# Altium PCB AW_SHIELD.PcbDoc
Units mil, origin at the board's own origin, x right, y up, seen from the top; angles counter-clockwise.
Board outline 2700 x 2100 mil, 2 copper layers (Top Layer, Bottom Layer); 125 components, 67 nets, 319 pads, 105 vias.
Unrouted connection lines stored in the file: 2.
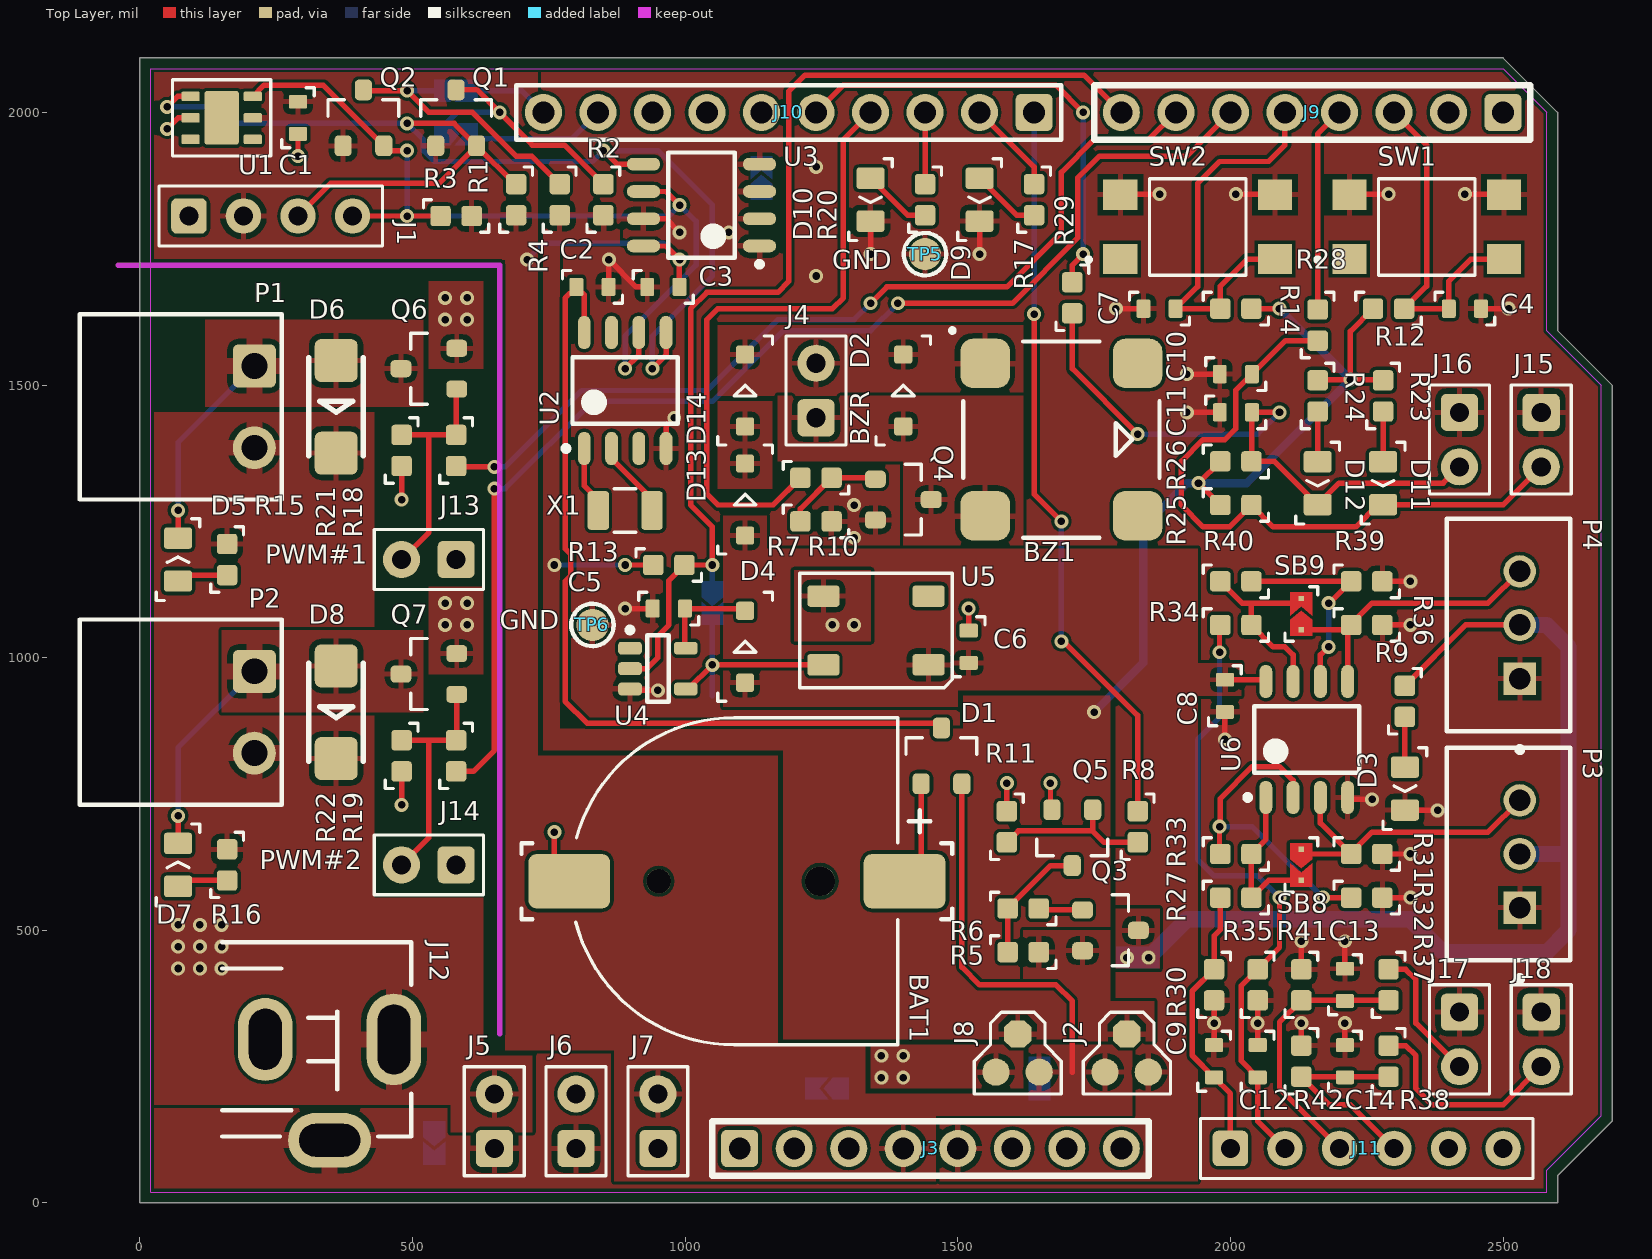
[diagram p0: Top Layer view]
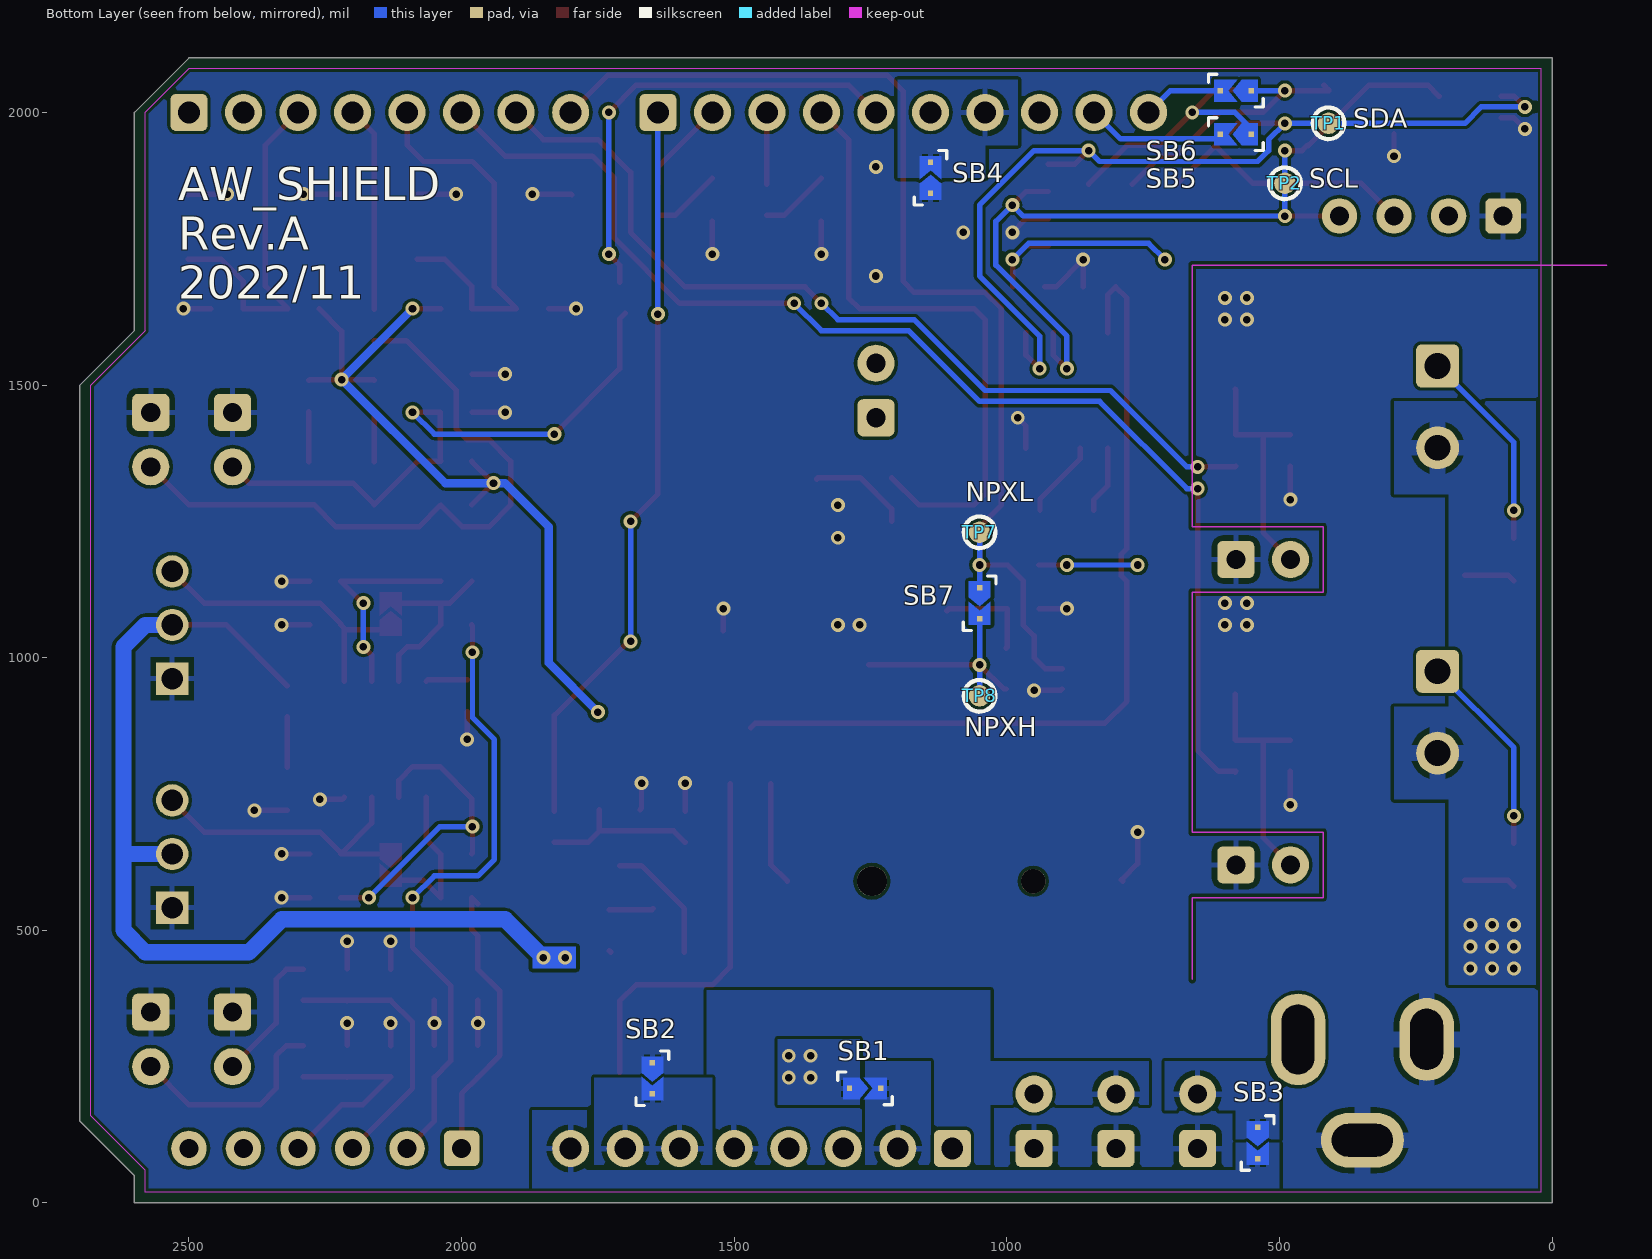
[diagram p1: Bottom Layer view, seen from below]
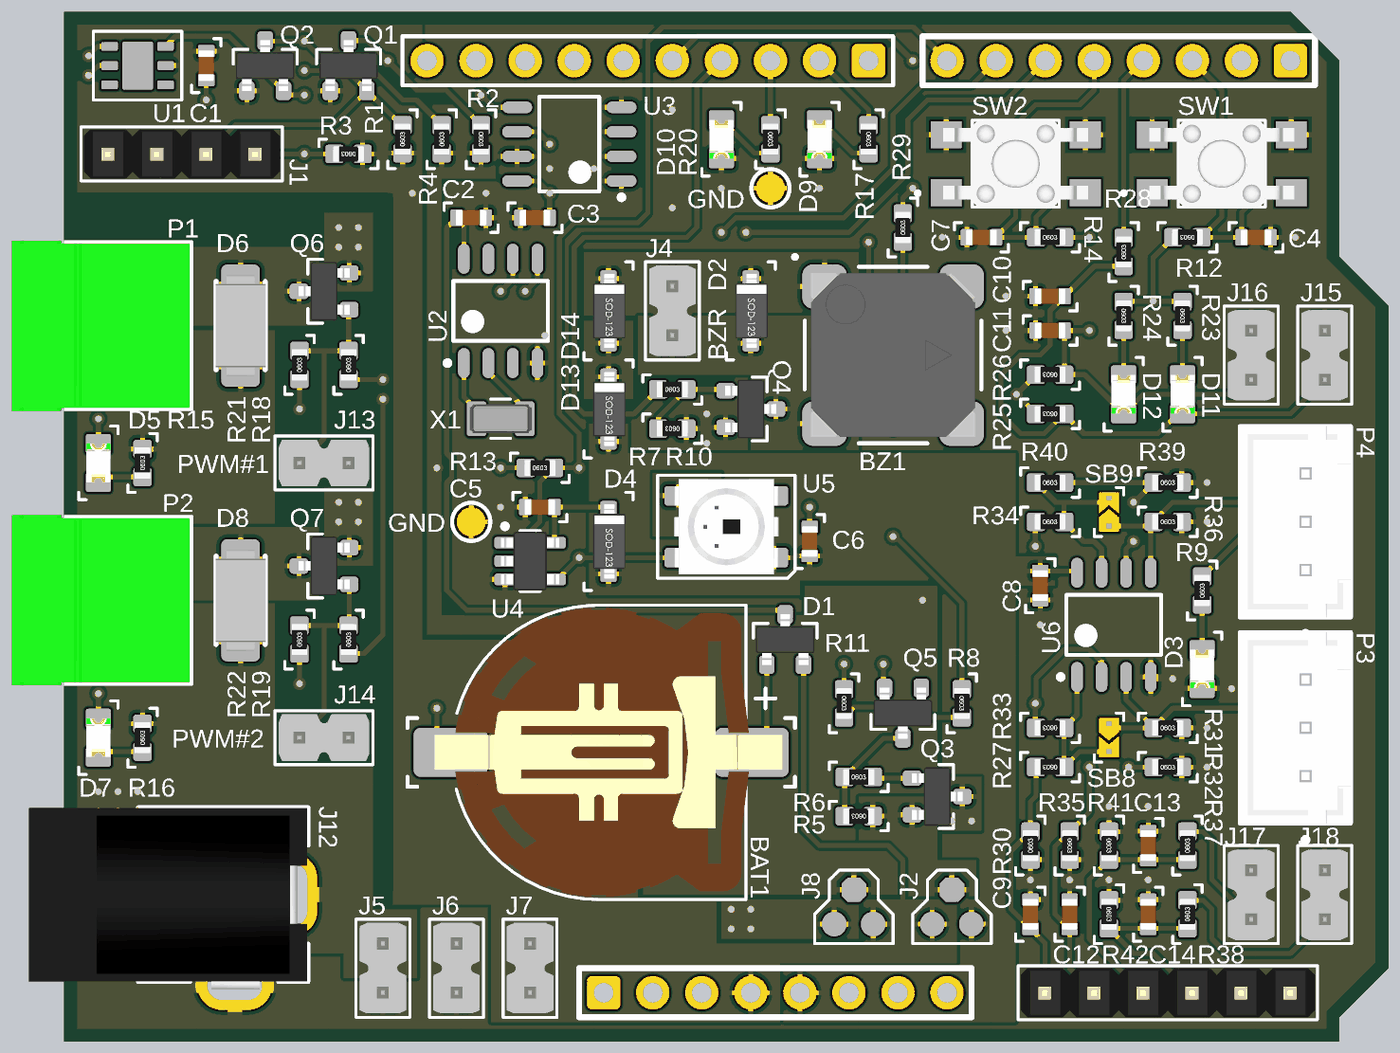
[diagram p2: 3D render of the assembled board from above, using the file's embedded part models]

## Layer stack, top to bottom
Top Solder: solder mask 0.4, Solder Resist, Dk 3.5
Top Layer: signal copper 1.4
Dielectric 1: dielectric 12.6, FR-4, Dk 4.8
Bottom Layer: signal copper 1.4
Bottom Solder: solder mask 0.4, Solder Resist, Dk 3.5

## Board outline
0,0 0,2100 2500,2100 2600,2000 2600,1600 2700,1500 2700,150 2600,50 2600,0

## Design rules (kind name [scope] priority, off if disabled: settings)
Clearance [All] p1: gap=6 ignorepadtopadclearanceinfootprint=FALSE
PolygonConnect PolygonConnect_VIN_Power_Connectors [All vs HasFootprint('CON JACK PWR 2.5mm PJ-002BH - duplicate') OR HasFootprint('KF128-2P')] p1: connectstyle=Relief reliefconductorwidth=30 reliefentries=4 polygonreliefangle="90 Angle" airgapwidth=10
PolygonConnect [All] p2: thpad.connectstyle=Relief thpad.reliefconductorwidth=10 thpad.reliefentries=4 thpad.polygonreliefangle="90 Angle" thpad.airgapwidth=10 smdpad.connectstyle=Relief smdpad.reliefconductorwidth=10 smdpad.reliefentries=4 smdpad.polygonreliefangle="90 Angle" smdpad.airgapwidth=10 via.connectstyle=Direct via.reliefconductorwidth=10 via.reliefentries=4 via.polygonreliefangle="90 Angle" via.airgapwidth=10
RoutingVias [All] p1: holewidth=13.78 width=25.59 viastyle="Through Hole" minholewidth=13.78 minwidth=25.59 maxholewidth=28 maxwidth=50
SolderMaskExpansion [All] p1: expansion=4
Width [All] p1: maxlimit=50 minlimit=6 preferedwidth=10
30 further rules are at their usual default settings.

## Classes and differential pairs
component class Main: BZ1 C4 C5 C6 C7 C15 D2 D3 D4 D5 D6 D7 D8 D9 D10 D13 D14 J2 J3 J4 J5 J6 J7 J8 J9 J10 J11 J12 J13 J14 P1 P2 Q3 Q4 Q5 Q6 Q7 Q? R5 R6 R7 R8 R9 R10 R11 R12 R13 R14 R15 R16 R17 R18 R19 R20 R21 R22 R43 R44 SB1 SB2 SB3 SB4 SB5 SB6 SB7 SB18 SW1 SW2 TP5 TP6 TP7 TP8 U4 U5
component class I2C: BAT1 C1 C2 C3 D1 J1 Q1 Q2 R1 R2 R3 R4 TP1 TP2 U1 U2 U3 X1
component class Inputs: C8 C9 C10 C11 C12 C13 C14 D11 D12 J15 J16 J17 J18 P3 P4 R23 R24 R25 R26 R27 R28 R29 R30 R31 R32 R33 R34 R35 R36 R37 R38 R39 R40 R41 R42 SB8 SB9 U6

## Components (designator, comment, footprint, x,y, rotation, side; value= is the part's Value field where it differs from the comment)
BAT1 "CR1220" BC501SM 1090,590 r0 top
BZ1 "MLT-8530" MLT-8530 1690,1400 r0 top
C1 "? F" 0603C_RF_M 290,1990 r90 top
C2 "? F" 0603C_RF_M 830,1680 r180 top
C3 "? F" 0603C_RF_M 960,1680 r0 top
C4 "? F" 0603C_RF_M 2430,1640 r180 top
C5 "? F" 0603C_RF_M 970,1090 r180 top
C6 "? F" 0603C_RF_M 1520,1020 r90 top
C7 "? F" 0603C_RF_M 1870,1640 r0 top
C8 "? F" 0603C_RF_M 1990,930 r90 top
C9 "? F" 0603C_RF_M 1970,260 r270 top
C10 "? F" 0603C_RF_M 2010,1520 r0 top
C11 "? F" 0603C_RF_M 2010,1450 r0 top
C12 "? F" 0603C_RF_M 2050,260 r270 top
C13 "? F" 0603C_RF_M 2210,400 r270 top
C14 "? F" 0603C_RF_M 2210,260 r270 top
D1 "BAT54C" IRLML_SOT-23 1470,820 r90 top
D2 "1N4148W" D_SOD-123 1400,1490 r90 top
D3 "Unspecified" 0805LED_RF_M 2320,760 r90 top
D4 "1N4148W" D_SOD-123 1110,1020 r90 top
D5 "Unspecified" 0805LED_RF_M 70,1180 r270 top
D6 "D" ONSEMI_DO214AC_RF_M 360,1460 r90 top
D7 "Unspecified" 0805LED_RF_M 70,620 r270 top
D8 "D" ONSEMI_DO214AC_RF_M 360,900 r90 top
D9 "Unspecified" 0805LED_RF_M 1540,1840 r90 top
D10 "Unspecified" 0805LED_RF_M 1340,1840 r90 top
D11 "Unspecified" 0805LED_RF_M 2280,1320 r90 top
D12 "Unspecified" 0805LED_RF_M 2160,1320 r90 top
D13 "1N4148W" D_SOD-123 1110,1290 r90 top
D14 "1N4148W" D_SOD-123 1110,1490 r90 top
J1 "PINHDR-4P1" HEADER-2.54-4P1 240,1810 r0 top
J2 "Choice" CHOICE_R0805_TR 1770,240 r0 top
J3 "PINHDR-8P1" PINHDR-8P1-2.54 1100,100 r0 top locked
J4 "PINHDR-2P1" HEADER-2.54-2P1 1240,1490 r90 top
J5 "PINHDR-2P1" HEADER-2.54-2P1 650,150 r90 top
J6 "PINHDR-2P1" HEADER-2.54-2P1 800,150 r90 top
J7 "PINHDR-2P1" HEADER-2.54-2P1 950,150 r90 top
J8 "Choice" CHOICE_R0805_TR 1570,240 r0 top
J9 "PINHDR-8P1" PINHDR-8P1-2.54 2500,2000 r180 top locked
J10 "PINHDR-10P1" HEADER-2.54-10P1 1640,2000 r180 top locked
J11 "PINHDR-6P1" HEADER-2.54-6P1 2250,100 r0 top locked
J12 "DC IN" "CON JACK PWR 2.5mm PJ-002BH - duplicate" 466,300 r180 top locked
J13 "PINHDR-2P1" HEADER-2.54-2P1 530,1180 r180 top
J14 "PINHDR-2P1" HEADER-2.54-2P1 530,620 r180 top
J15 "PINHDR-2P1" HEADER-2.54-2P1 2570,1400 r270 top
J16 "PINHDR-2P1" HEADER-2.54-2P1 2420,1400 r270 top
J17 "PINHDR-2P1" HEADER-2.54-2P1 2420,300 r270 top
J18 "PINHDR-2P1" HEADER-2.54-2P1 2570,300 r270 top
P1 "Terminal Block" KF128-2P 210,1460 r270 top
P2 "Terminal Block" KF128-2P 210,900 r270 top
P3 "JST_XH-3P" JST_B3B-XH-A_LF_SN 2510,640 r90 top
P4 "JST_XH-3P" JST_B3B-XH-A_LF_SN 2510,1060 r90 top
Q1 "BSS138" IRLML_SOT-23 580,1990 r90 top
Q2 "BSS138" IRLML_SOT-23 410,1990 r90 top
Q3 "PMV65XP-215" IRLML_SOT-23 1780,500 r0 top
Q4 "BSS138" IRLML_SOT-23 1400,1290 r0 top
Q5 "BSS138" IRLML_SOT-23 1710,670 r270 top
Q6 "AO3400A" IRLML_SOT-23 530,1530 r180 top
Q7 "AO3400A" IRLML_SOT-23 530,970 r180 top
R1 "? R" R0603_RF_M 690,1840 r90 top
R2 "? R" R0603_RF_M 850,1840 r270 top
R3 "? R" R0603_RF_M 580,1810 r180 top
R4 "? R" R0603_RF_M 770,1840 r90 top
R5 "? R" R0603_RF_M 1620,460 r180 top
R6 "? R" R0603_RF_M 1620,540 r0 top
R7 "? R" R0603_RF_M 1240,1330 r0 top
R8 "? R" R0603_RF_M 1830,690 r270 top
R9 "? R" R0603_RF_M 2320,920 r90 top
R10 "? R" R0603_RF_M 1240,1250 r180 top
R11 "? R" R0603_RF_M 1590,690 r270 top
R12 "? R" R0603_RF_M 2290,1640 r180 top
R13 "? R" R0603_RF_M 970,1170 r0 top
R14 "? R" R0603_RF_M 2010,1640 r0 top
R15 "? R" R0603_RF_M 160,1180 r90 top
R16 "? R" R0603_RF_M 160,620 r90 top
R17 "? R" R0603_RF_M 1640,1840 r270 top
R18 "? R" R0603_RF_M 580,1380 r90 top
R19 "? R" R0603_RF_M 580,820 r90 top
R20 "? R" R0603_RF_M 1440,1840 r270 top
R21 "? R" R0603_RF_M 480,1380 r90 top
R22 "? R" R0603_RF_M 480,820 r90 top
R23 "? R" R0603_RF_M 2280,1480 r270 top
R24 "? R" R0603_RF_M 2160,1480 r270 top
R25 "? R" R0603_RF_M 2010,1280 r180 top
R26 "? R" R0603_RF_M 2010,1360 r180 top
R27 "? R" R0603_RF_M 2010,560 r180 top
R28 "? R" R0603_RF_M 2160,1610 r90 top
R29 "? R" R0603_RF_M 1710,1660 r90 top
R30 "? R" R0603_RF_M 1970,400 r90 top
R31 "? R" R0603_RF_M 2250,640 r0 top
R32 "? R" R0603_RF_M 2250,560 r0 top
R33 "? R" R0603_RF_M 2010,640 r180 top
R34 "? R" R0603_RF_M 2010,1060 r0 top
R35 "? R" R0603_RF_M 2050,400 r270 top
R36 "? R" R0603_RF_M 2250,1060 r0 top
R37 "? R" R0603_RF_M 2290,400 r90 top
R38 "? R" R0603_RF_M 2290,260 r90 top
R39 "? R" R0603_RF_M 2250,1140 r0 top
R40 "? R" R0603_RF_M 2010,1140 r0 top
R41 "? R" R0603_RF_M 2130,400 r270 top
R42 "? R" R0603_RF_M 2130,260 r270 top
SB1 "Solder Bridge" SLDR_BRDG_0603_OPEN 1260,210 r180 bottom
SB2 "Solder Bridge" SLDR_BRDG_0603_OPEN 1650,228.54 r270 bottom locked
SB3 "Solder Bridge" SLDR_BRDG_0603_OPEN 540,110 r270 bottom locked
SB4 "Solder Bridge" SLDR_BRDG_0603_OPEN 1140,1880 r90 bottom
SB5 "Solder Bridge" SLDR_BRDG_0603_OPEN 580,1960 r0 bottom locked
SB6 "Solder Bridge" SLDR_BRDG_0603_OPEN 580,2040 r0 bottom locked
SB7 "Solder Bridge" SLDR_BRDG_0603_OPEN 1050,1100 r270 bottom
SB8 "Solder Bridge" SLDR_BRDG_0603_OPEN 2130,620 r270 top
SB9 "Solder Bridge" SLDR_BRDG_0603_OPEN 2130,1080 r90 top
SW1 "BTN-SPST-NO-4C" SW_TL3305AF160QG 2360,1790 r0 top
SW2 "BTN-SPST-NO-4C" SW_TL3305AF160QG 1940,1790 r0 top
TP1 "SDA" PAD_R_1MM 410,1980 r90 bottom
TP2 "SCL" PAD_R_1MM 490,1870 r90 bottom
TP5 "GND" PAD_R_1.5MM 1440,1740 r0 top
TP6 "GND" PAD_R_1.5MM 830,1060 r0 top
TP7 "NPXL" PAD_R_1MM 1050,1230 r0 bottom
TP8 "NPXH" PAD_R_1MM 1050,930 r90 bottom
U1 "SI7021-A20" SI7021_DFN-6_RF_M 150,1990 r0 top
U2 "PCF8563T" SOIC-8 890,1490 r90 top
U3 "24LC16B" SOIC-8 1030,1830 r180 top
U4 "SN74LVC1G17DBVR" TI_SOT-23-5 950,980 r0 top
U5 "WS2812B" WS2812B 1350,1050 r180 top locked
U6 "MCP6002-I/SN" SOIC-8 2140,850 r90 top
X1 "32.768 kHz" XTAL_3215 890,1270 r0 top

## Footprints (in the part's own frame and the unit in brackets; to place one, negate y for a bottom-side part, rotate by r counter-clockwise, add the part's x,y. Pads: shape width x height; smd on the part's side, far side on the other; paste and mask are expansions set on the pad)
0603C_RF_M [mm] "Chip Capacitor 0603 Reflow Medium"
  rrect25% 0.65x0.85 smd: 1(-0.75,0) 2(0.75,0)
  silkscreen extent -1.4,-0.76 1.4,0.76, body extent -0.8,-0.4 0.8,0.41, height 0.9
0805LED_RF_M [mm] "Chip LED 0805 Reflow Medium"
  rrect25% 1x1.3 smd: A(1,0) C(-1,0)
  silkscreen extent -1.91,-1.02 1.91,1.02, body extent -1,-0.62 1,0.63, height 0.7
BC501SM [mil] "BATTERY HOLDER COIN 12MM CR1220 SMD"
  round 45 hole 45 unplated mask-50: M1(-138.49,0.01)
  round 55 hole 55 unplated mask-60: M2(157.51,0.01)
  rrect30% 150x100 smd: N(-302.49,0.01) P(312.51,0.01)
  silkscreen extent -390,-300 400,300, body extent -335,-295 374,295, height 162
CHOICE_R0805_TR [mil]
  round 50 smd: 1(0,0) 2(79.37,0.01)
  oct 50x50 smd: 3(40,70)
  silkscreen extent -40,-40 120,110
"CON JACK PWR 2.5mm PJ-002BH - duplicate" [mil] "Connector, Power Jack, 2.5 mm x 5.1 mm, 24 V, 5 A, Right Angle, TH"
  oval 100x167.95 hole 60 slot 127.95 at 90 deg: 1(0,0)
  oval 100x152.2 hole 60 slot 112.2 at 90 deg: 2(236,0)
  oval 152.2x100 hole 60 slot 112.2 at 0 deg: 3(118,185)
  silkscreen extent -32,-178 315,178, body extent -29,-177 537,193, height 435
D_SOD-123 [mm] "SOD-123 Diode [Vishay]"
  rrect30% 0.85x0.85 smd: A(-1.675,0) C(1.675,0)
  silkscreen extent -2.54,-1.27 2.54,1.27, body extent -1.93,-0.89 1.93,0.81, height 1.46
HEADER-2.54-2P1 [mil] "Pin Header Single Row 2 Positions Pitch 2.54 mm"
  rrect30% 68x68 hole 35: 1(-50,0)
  round 68 hole 35: 2(50,0)
  silkscreen extent -100,-55 100,55, body extent -92,-47 92,47, height 330
HEADER-2.54-4P1 [mil] "Pin Header Single Row 4 Positions Pitch 2.54 mm"
  rrect30% 65x65 hole 35: 1(-150,0)
  round 65 hole 35: 2(-50,0) 3(50,0) 4(150,0)
  silkscreen extent -205,-55 205,55, body extent -200,-50 200,50, height 362
HEADER-2.54-6P1 [mil] "Pin Header Single Row 6 Positions Pitch 2.54 mm"
  rrect30% 65x65 hole 35: 1(-250,0)
  round 65 hole 35: 2(-150,0) 3(-50,0) 4(50,0) 5(150,0) 6(250,0)
  silkscreen extent -305,-55 305,55, body extent -300,-50 300,50, height 362
HEADER-2.54-10P1 [mil] "Pin Header Single Row 10 Positions Pitch 2.54 mm"
  rrect30% 68x68 hole 40: 1(0,0)
  round 68 hole 40: 2(100,0) 3(200,0) 4(300,0) 5(400,0) 6(500,0) 7(600,0) 8(700,0) 9(800,0) 10(900,0)
  silkscreen extent -50,-50 950,50
IRLML_SOT-23 [mm] "Infineon's IRLML Series Logic-Level Transistor SOT-23"
  rrect50% 0.97x0.8 smd: 1(-1.3,0.95) 2(-1.3,-0.95) 3(1.3,0)
  silkscreen extent 0.08,-1.65 0.84,1.65, body extent -1.32,-1.52 1.32,1.52, height 1.12
JST_B3B-XH-A_LF_SN [mm]
  rect 1.508x1.508 hole 1: 1(-2.5,-0.525)
  round 1.508 hole 1: 2(0,-0.525) 3(2.5,-0.525)
  silkscreen extent -5.93,-2.87 4.95,2.88, body extent -4.95,-2.87 4.95,2.88, height 7.01
KF128-2P [mm] "Compatible with Phoenix Contact 1803277"
  rrect25% 2x2 hole 1.2: 1(-1.905,0)
  round 2 hole 1.2: 2(1.905,0)
  silkscreen extent -4.32,-8.13 4.32,1.27, body extent -4.4,-8.03 4.41,1.17, height 7.21
MLT-8530 [mm]
  rrect50% 2.3x2.3 smd: N(-3.55,-3.55) N.C.(3.55,-3.55) N.C.(3.55,3.55) P(-3.55,3.55)
  silkscreen extent -5.18,-4.57 4.57,5.18, body extent -4.25,-4.25 4.25,4.25, height 3.01
ONSEMI_DO214AC_RF_M [mm]
  rrect30% 2x2 smd: A(2.159,0) C(-2.159,0)
  silkscreen extent -2.29,-1.27 2.29,1.27, body extent -2.61,-1.3 2.61,1.3, height 2.3
PAD_R_1.5MM [mm] "Pad Rounded 1.5mm"
  round 1.5 smd paste-10: 1(0,0)
  silkscreen extent -0.99,-0.99 0.99,0.99
PAD_R_1MM [mm] "Pad Rounded 1mm"
  round 1 smd paste-10: 1(0,0)
  silkscreen extent -0.74,-0.73 0.74,0.74
PINHDR-8P1-2.54 [mil] "Pin Header Single Row 8 Positions Pitch 2.54 mm"
  rrect30% 68x68 hole 40: 1(0,0)
  round 68 hole 40: 2(100,0) 3(200,0) 4(300,0) 5(400,0) 6(500,0) 7(600,0) 8(700,0)
  silkscreen extent -50,-50 750,50
R0603_RF_M [mm] "Resistor SMD 0603 Reflow Medium Density"
  rrect30% 0.95x0.95 smd: 1(-0.725,0) 2(0.725,0)
  silkscreen extent -1.52,-0.76 1.52,0.76, body extent -0.8,-0.4 0.8,0.4, height 0.45
SI7021_DFN-6_RF_M [mm] "DFN-6 Reflow Medium Density"
  rrect30% 0.85x0.45 smd: 1(-1.45,1) 2(-1.45,0) 3(-1.45,-1) 4(1.45,-1) 5(1.45,0) 6(1.45,1)
  rrect15% 1.6x2.5 smd: TAB(0,0)
  silkscreen extent -2.29,-1.78 2.29,1.78
SLDR_BRDG_0603_OPEN [mil] "Solder Bridge / Resistor SMD 0603 (Open)"
  rect 10x10 smd: 1(-28.54,0) 2(28.54,0)
  Top Layer region: -40,20 -10.67,20 6,0 -10.67,-20 -40,-20
  Top Layer region: -2.67,20 14,0 -2.67,-20 40,-20 40,20
  silkscreen extent -50,-30 50,30
SOIC-8 [mm]
  oval 1.55x0.6 smd: 1(-2.7,1.905) 2(-2.7,0.635) 3(-2.7,-0.635) 4(-2.7,-1.905) 5(2.7,-1.905) 6(2.7,-0.635) 7(2.7,0.635) 8(2.7,1.905)
  silkscreen extent -2.82,-2.45 1.55,2.88, body extent -1.95,-2.45 1.95,2.45, height 1.75
SW_TL3305AF160QG [mm]
  rect 1.6x1.4 smd: 1(-3.6,-1.5) 2(3.6,-1.5) 3(-3.6,1.5) 4(3.6,1.5)
  silkscreen extent -5.18,-2.25 2.25,2.25, body extent -3.75,-2.25 3.75,2.25, height 3.81
TI_SOT-23-5 [mm]
  rrect50% 1.1x0.6 smd: 1(-1.3,0.95) 2(-1.3,0) 3(-1.3,-0.95) 4(1.3,-0.95) 5(1.3,0.95)
  silkscreen extent -1.42,-1.55 0.5,1.92, body extent -1.5,-1.53 1.5,1.53, height 1.45
WS2812B [mm]
  rrect30% 1.5x1 smd: 1(-2.45,1.6) 2(-2.45,-1.6) 3(2.45,-1.6) 4(2.45,1.6)
  silkscreen extent -3.56,-2.67 3.56,2.67, body extent -2.7,-2.47 2.7,2.48, height 1.6
XTAL_3215 [mm] "Crystal SMD 3.2x1.5mm 2-Flat Leads"
  rrect30% 1x1.8 smd: 1(-1.25,0) 2(1.25,0)
  silkscreen extent -0.51,-1.02 0.51,1.02, body extent -1.6,-0.75 1.6,0.75, height 0.9

## Part data
BAT1: library part BC501SM, "Single Cell Battery", Nominal Voltage=3V, Supplier Part No=BC501SM-ND, Mounting Technology=SMT, Suitable Battery=CR1220, Supplier=DigiKey, Supplier Link=https://www.digikey.com/en/products/detail/mpd-memory-protection-devices/BC501SM/2439260
BZ1: "Magnetic Buzzer SMD 8.5x3.3 Passive 2.5V~4.5V", Manufacturer="Jiangsu Huaneng Elec", Rated Voltage="3.6 V", Resonant Frequency="2700 Hz", Alternative Supplier Link=https://www.aliexpress.ru/item/1005003620291811.html, Category=Buzzer, Mounting Technology=SMT, Supplier=LCSC, Supplier Link=https://www.lcsc.com/mobile/product-detail/Buzzers_Jiangsu-Huaneng-Elec-MLT-8530_C94599.html
C1 C2 C3 C4 C5 C6 C7 C8 C9 C10 C11 C12 C13 C14: library part C, "Capacitor", Manufacturer="Generic Brand", Max Voltage="? V", Tolerance=?, Category=Capacitor, Mounting Technology=SMT, Supplier Link=http://
D1: "DIODE ARRAY SCHOTTKY COMM CATH 30V 0.2A SOT-23", Manufacturer="Diodes Incorporated", Package=SOT-23-3, PartNo=BAT54C-FDICT-ND, BaseProduct=BAT54C, DiodeConfiguration="1 Pair Common Cathode", MountingTechnology=SMT, ProductNumber=BAT54C-7-F, Supplier=DigiKey, UnitPrice=$0.18, URL=https://www.digikey.com/en/products/detail/diodes-incorporated/BAT54C-7-F/717701
D2 D4 D13 D14: "DIODE GEN PURP 100V 300MA SOD123", Manufacturer="Diodes Incorporated", Manufacturer Product Number=1N4148W-7-F, Package=SOD-123, Supplier Part No=1N4148W-FDICT-ND, Mounting Technology=SMT, Similar Part=BAV16W, Supplier URL=https://www.digikey.com/en/products/detail/diodes-incorporated/1N4148W-7-F/814371
D3 D5 D7 D9 D10 D11 D12: library part LED, "LED", Forward Voltage Drop="? V", Manufacturer="Generic Brand", Category=Diode, Emitting Color=Unspecified, Mounting Technology=SMT, Supplier Link=http://
D6 D8: "Diode (Rectifier)", Manufacturer="Generic Brand", Max Forward Voltage="? V", Power Rating="? W", Category=Diode, Mounting Technology=SMT, Supplier Link=http://
J1: "Generic Pin Header 4x1"
J3 J9: "Pin Header Single Row 8 Positions", Mounting Technology=THT
J4 J5 J6 J7 J13 J14 J15 J16 J17 J18: "Pin Header Single Row 2 Positions", Mounting Technology=THT
J10: "Generic Pin Header 10x1"
J11: "Pin Header Single Row 6 Positions", Mounting Technology=THT
J12: library part PJ-002BH, "CONN PWR JACK 2.5X5.5MM SOLDER", Manufacturer="CUI Devices", PartNo=CP-002BH-ND, MountType=THT, ProductNumber=PJ-002BH, Supplier=DigiKey, UnitPrice=$0.74, URL=https://www.digikey.com/en/products/detail/cui-devices/PJ-002BH/408447
P1 P2: library part TERM-BLOCK-2C
P3 P4: "CONN HEADER VERT 3POS 2.5MM"
Q1 Q2 Q4 Q5: "MOSFET N-CH 50V 200MA SOT23", Alternative Supplier Part No=457167271, Manufacturer="ON Semiconductor", Manufacturer Part No=BSS138LT1G, Package=SOT-23, Supplier Part No=BSS138LCT-ND, Alternative Supplier=Chipdip, Alternative Supplier Link=https://www.chipdip.by/product/bss138-onsemi, Mounting Technology=SMT, Supplier=DigiKey, Supplier Link=https://www.digikey.com/en/products/detail/on-semiconductor/BSS138L/5044751
Q3: "MOSFET P-CH 20V 2.8A 23SOT", Alternative Supplier Part No=9000037397, Drain-Source Breakdown Voltage=-20V, Drain Current="-2.8A (max.)", Gate-Source Threshold Voltage="-0.69V (typ.)", Max Gate-Source Voltage="12V (abs.)", Package=SOT-23, Supplier Part No=1727-3124-1-ND, Alternative Supplier=Chipdip, Alternative Supplier Link=https://www.chipdip.by/product/pmv65xp.215, Mounting Technology=SMT, Supplier=DigiKey, Supplier Link=https://www.digikey.com/en/products/detail/nexperia-usa-inc/PMV65XP-215/949643
Q6 Q7: "MOSFET N-CH 30V 5.7A SOT23-3L", Manufacturer="Alpha & Omega", Package=SOT-23-3L, Supplier Part No=1626916488, Manufacturer Part No=AO3400A, Mounting Technology=SMT, Supplier=AliExpress, Supplier Link=https://aliexpress.ru/item/1626916488.html
R1 R2 R3 R4 R5 R6 R7 R8 R9 R10 R11 R12 R13 R14 R15 R16 R17 R18 R19 R20 R21 R22 R23 R24 R25 R26 R27 R28 R29 R30 R31 R32 R33 R34 R35 R36 R37 R38 R39 R40 R41 R42: library part R, "Resistor", Manufacturer="Generic Brand", Max Voltage="? V", Power Rating="? W", Tolerance=?, Category=Resistor, Mounting Technology=SMT, Supplier Link=http://
SW1 SW2: "Tactile Switch SPST-NO", Manufacturer="Generic Brand", Category="Tactile Button", Mounting Technology=THT, Supplier Link=http://
TP1 TP2 TP5 TP6 TP7 TP8: library part "Test Point", "Test Point / Pad"
U1: "SENS HUMID/TEMP 3.6V I2C 2% 6DFN", Manufacturer="Silicon Labs", Manufacturer Product Number=SI7021-A20-GM1R, Package=DFN-6, Supplier Package="Cut Tape (CT)", Supplier Part No=336-4380-1-ND, Mounting Type=SMT, Supplier URL=https://www.digikey.com/en/products/detail/silicon-labs/SI7021-A20-GM1/5048934
U4: "IC BUF NON-INVERT 5.5V SOT23-5", Manufacturer="Texas Instruments", Operating Temperature="-40°C ~ 125°C (TA)", Package=SOT-23-5, Supplier Part No=296-11933-1-ND, Manufacturer Product Number=SN74LVC1G17DBVR, Mounting Type=SMT, Supplier Packaging="Cut Tape", Supplier Unit Price=$0.29, Supplier URL=https://www.digikey.com/en/products/detail/texas-instruments/SN74LVC1G17DBVR/389051
U5: "ADDRESS LED DISCRETE SERIAL RGB", Manufacturer=Worldsemi
U6: "IC OPAMP GP 2 CIRCUIT 8SOIC", DIGIKEY_PART_NO=MCP6002-I/SN-ND, DIGIKEY_UNIT_PRICE=$0.33, DIGIKEY_URL=https://www.digikey.com/en/products/detail/microchip-technology/MCP6002-I-SN/500876
X1: library part KX-327NHT, "Crystal Resonator (2 Leads)", Alternative Supplier Part No=33387, Load Capacitance="12.5 pF", Manufacturer=Geyer, Tolerance="20 ppm", Alternative Supplier=Belchip, Alternative Supplier Link=https://belchip.by/product/?selected_product=33387, Category=Crystal, Manufacturer Part No=KX-327NHT, Mounting Technology=SMT

## Via types
v1: diameter 25.59, hole 13.78, Top Layer to Bottom Layer, tented both sides, 105 vias

## Nets (pads, with @x,y where several pads share a name; then routed paths per layer and width w, separated by ;. In a path a pad name is that pad's centre, name@x,y a point inside that pad or via, vN(x,y) a via of type N, cw(c..) or ccw(c..) an arc to the next point about the centre after c; other vN are vias at no path point)
3V3: C1.2 C3.2 D1.2 J1.2 J2.1 J3.4 J7.2 J8.2 Q1.1 Q2.1 R1.1 R3.1 U1.5 U3.8 | length 1126.1
  Top Layer w10: U3.8 965,1755 989.53,1730.47 C3.2 ; D1.2 1507.4,432.6 1540,400 1680,400 1710,370 1710,240
  Bottom Layer w10: v1(710,1730) 740,1760 960,1760 v1(990,1730)
5V: C6.1 C8.2 D4.A D13.A J2.2 J3.5 J6.2 U5.1 U6.8 | length 77
  Top Layer w10: C8.2@1989.53,960 C8.2 2061.77,959.53 U6.8
AIN_1: C9.2 J11.1 R27.2 R30.2 | length 526.5
  Top Layer w10: R27.2@1970,548.54 R27.2 1981.46,501.46 1970,490 R30.2 1930,388.54 1930,270.47 C9.2 2000,200.47 J11.1
AIN_2: C12.2 J11.2 R34.1 R35.1 | length 1148.3
  Top Layer w10: v1(1980,1010) 1980,1058.54 R34.1 ; v1(2090,560) 2090,468.54 R35.1 2020,398.54 2020,260.47 C12.2 2050,150 J11.2
  Bottom Layer w10: v1(1980,1010) 1980,890 1940,850 1940,630 1970,600 2050,600 v1(2090,560)
AIN_3: C13.2 J11.3 R37.1 R41.2 | length 495
  Top Layer w10: J11.3 2090,210 2090,331.46 R41.2 C13.2@2209.02,371.46 ; C13.2 C13.2@2209.02,371.46 ; R37.1 C13.2@2209.02,371.46
AIN_4: C14.2 J11.4 R38.1 R42.2 | length 385.8
  Top Layer w10: C14.2 C14.2@2209.02,231.46 ; R38.1 C14.2@2209.02,231.46 ; J11.4 2220,180 2181.46,180 R42.2 C14.2@2209.02,231.46
BTN_1: C4.2 J9.3 R12.1 SW1.1 SW1.2 | length 652.5
  Top Layer w10: J9.3 2360,1940 2360,1681.46 R12.1 C4.2 2400.47,1690.47 2440.94,1730.94 SW1.2
BTN_2: C7.2 J9.5 R14.1 SW2.1 SW2.2 | length 739.9
  Top Layer w10: SW2.2 2030.94,1730.94 1981.46,1681.46 R14.1 C7.2 1940,1680.47 1940,1870 1980,1910 2070,1910 2100,1940 J9.5
BZGND: BZ1.N D2.A J4.1 Q4.3
BZR: J10.4 R7.1 | length 1147.7
  Top Layer w10: R7.1 1161.46,1280 1060,1280 1040,1300 1040,1620 1060,1640 1270,1640 1290,1660 1290,1950 J10.4
GND: BAT1.N C1.1 C2.1 C3.1 C4.1 C5.2 C6.2 C7.1 C8.1 C9.1 C10.1 C11.1 C12.1 C13.1 C14.1 D3.C D9.C D10.C J1.1 J5.1 J6.1 J7.1 J12.2 J12.3 J13.1 J14.1 J15.1 J16.1 J17.1 J18.1 P3.1 P4.1 Q4.2 Q5.2 Q6.2 Q7.2 R10.1 R11.1 R21.1 R22.1 R30.1 R31.2 R32.2 R35.2 R36.2 R39.2 R41.1 R42.1 SB2.1 SB4.1 SW1.3 SW1.4 SW2.3 SW2.4 TP5.1 TP6.1 U1.2 U2.4 U3.1 U3.2 U3.3 U3.4 U3.7 U4.3 U5.3 U6.4 | length 2185.6
  Top Layer w10: v1(50,1970) 70,1990 U1.2 ; v1(290,1920) C1.1 ; v1(480,730) R22.1 ; v1(480,1290) R21.1 ; v1(760,680) 760,622.5 790,592.5 BAT1.N ; C2.1 860,1680.47 v1(860,1730) 910,1680 C3.1 ; v1(890,1090) C5.2 ; U4.3 901.42,940 v1(950,940) ; U3.7 965,1805 v1(990,1780) ; U2.4 965,1425 v1(980,1440) ; v1(1340,1740) D10.C ; C6.2 v1(1520,1090) ; v1(1540,1740) D9.C ; R11.1 v1(1590,770) ; v1(1670,770) 1670,723.78 Q5.2 ; v1(1790,1640) C7.1 ; SW2.3 1799.21,1850 v1(1870,1850) ; v1(1920,1450) C11.1 ; v1(1920,1520) C10.1 ; C9.1 v1(1970,330) R30.1 ; v1(1990,850) C8.1 ; v1(2010,1850) 2080.79,1850 SW2.4 ; C12.1 v1(2050,330) R35.2 ; R42.1 v1(2130,330) ; R41.1 v1(2130,480) ; C14.1 v1(2210,330) ; C13.1 v1(2210,480) ; U6.4 2218.7,740 v1(2260,740) ; SW1.3 2219.21,1850 v1(2290,1850) ; R32.2 v1(2330,560) ; R31.2 v1(2330,640) ; R36.2 v1(2330,1060) ; R39.2 v1(2330,1140) ; D3.C 2379.37,720.63 v1(2380,720) ; v1(2430,1850) 2500.79,1850 SW1.4 ; C4.1 v1(2510,1640)
  other v1: 560,1060 600,1060 1270,1060 1310,1060 560,1100 600,1100 1310,1220 1310,1280 560,1620 600,1620 560,1660 600,1660 1240,1700 1080,1780 1240,1900
GND_SHL1: J3.6 J3.7 SB2.2
GND_SHL2: J10.7 SB4.2
HVOUT_1_GND: D5.C D6.A P1.1 Q6.3 | length 373.6
  Top Layer w10: D5.C v1(70,1270)
  Bottom Layer w10: v1(70,1270) 70,1395 P1.1
HVOUT_2_GND: D7.C D8.A P2.1 Q7.3 | length 373.6
  Top Layer w10: D7.C v1(70,710)
  Bottom Layer w10: v1(70,710) 70,835 P2.1
LED_1: J10.2 R17.1 | length 172.9
  Top Layer w10: J10.2 1640,1900 R17.1
LED_2: J10.3 R20.1 | length 131.5
  Top Layer w10: R20.1 J10.3
NEOPIXEL: J9.8 R13.2 SB7.1 TP7.1 U4.2 | length 2089.1
  Top Layer w10: U4.2 930,980 950,1000 950,1040 970,1060 970,1141.46 R13.2 v1(1050,1170) 1050,1240 1010,1280 1010,1640 1040,1670 1170,1670 1190,1690 1190,2038.5 1220,2068.5 1731.5,2068.5 J9.8
  Bottom Layer w10: SB7.1 v1(1050,1170) TP7.1
NetBZ1_P: BZ1.P D2.C D14.C J4.2
NetD3_A: D3.A R9.1 | length 92.1
  Top Layer w10: D3.A R9.1
NetD5_A: D5.A R15.1 | length 94.5
  Top Layer w10: D5.A 80.83,1151.46 R15.1
NetD7_A: D7.A R16.1 | length 94.5
  Top Layer w10: D7.A 80.83,591.46 R16.1
NetD9_A: D9.A R17.2 | length 128.1
  Top Layer w10: D9.A 1607.91,1811.46 R17.2
NetD10_A: D10.A R20.2 | length 128.1
  Top Layer w10: D10.A 1407.91,1811.46 R20.2
NetD11_A: D11.A R23.2 | length 92.1
  Top Layer w10: D11.A R23.2
NetD12_A: D12.A R24.2 | length 92.1
  Top Layer w10: D12.A R24.2
NetD13_C: D13.C D14.A
NetJ17_2: J17.2 R37.2 | length 250.8
  Top Layer w10: R37.2 2321.46,428.54 2340,410 2340,330 J17.2
NetJ18_2: J18.2 R38.2 | length 389.1
  Top Layer w10: R38.2 2321.46,288.54 2340,270 2340,210 2370,180 2500,180 J18.2
NetQ3_1: Q3.1 R6.2 | length 81.4
  Top Layer w10: R6.2 1651.14,537.4 Q3.1
NetQ4_1: Q4.1 R7.2 R10.2 | length 185
  Top Layer w10: R10.2 1211.46,1272.91 R7.2 1346.22,1330 Q4.1
NetQ5_1: Q5.1 R8.2 R11.2 | length 296.1
  Top Layer w10: R11.2 1611.14,682.6 1747.4,682.6 ; Q5.1 1747.4,682.6 ; R8.2 1768.54,661.46 1747.4,682.6
NetQ5_3: Q5.3 R5.2 R6.1 | length 231.2
  Top Layer w10: R5.2 R6.1 1670.28,618.82 Q5.3
NetR27_1: R27.1 R33.1 SB8.2 U6.1 | length 299.1
  Top Layer w10: U6.1 2065,666.46 R33.1 R27.1 2070,591.46 SB8.2
NetR32_1: R32.1 R33.2 U6.2 | length 597.4
  Top Layer w10: R33.2 1980,641.46 v1(1980,690) 1981.46,691.46 1981.46,741.46 2040,800 2090,800 2115,775 U6.2 ; v1(2170,560) R32.1
  Bottom Layer w10: v1(1980,690) 2040,690 v1(2170,560)
NetR34_2: R34.2 R40.1 SB9.2 U6.7 | length 357.2
  Top Layer w10: R40.1 2021.46,1100 2040,1100 ; U6.7 2115,1005 2100,1020 2078.54,1020 R34.2 2038.54,1098.54 2040,1100 ; SB9.2 2121.46,1100 2040,1100
NetR39_1: R39.1 R40.2 U6.6 | length 390.9
  Top Layer w10: R40.2 R39.1 2181.46,1100 v1(2180,1100) ; U6.6 2165,1005 v1(2180,1020)
  Bottom Layer w10: v1(2180,1020) v1(2180,1100)
NetU2_1: U2.1 X1.1 | length 124.4
  Top Layer w10: U2.1 815,1315 840.79,1289.21 X1.1
NetU2_2: U2.2 X1.2 | length 144.4
  Top Layer w10: U2.2 865,1365 939.21,1290.79 X1.2
NPX4V3: C5.1 D4.C U4.5 | length 185.4
  Top Layer w10: U4.5 999.53,1019.06 C5.1 1105.95,1090 D4.C
NPX_DIN: SB7.2 TP8.1 U4.4 U5.4 | length 412.2
  Top Layer w10: U4.4 1005.59,942.6 v1(1050,987.01) U5.4
  Bottom Layer w10: TP8.1 v1(1050,987.01) SB7.2
PWM_1: J9.7 R18.1 | length 1654.3
  Top Layer w10: R18.1 581.46,1350 v1(650,1350) ; v1(1340,1650) 1370,1680 1590,1680 1690,1780 1690,1890 1750,1950 1850,1950 J9.7
  Bottom Layer w10: v1(650,1350) 670,1350 810,1490 1040,1490 1170,1620 1310,1620 v1(1340,1650)
PWM_1#: J13.2 Q6.1 R18.2 R21.2 | length 433.8
  Top Layer w10: J13.2 530,1230 530,1408.54 ; R21.2 530,1408.54 ; Q6.1 580,1491.42 R18.2 530,1408.54
PWM_2: J9.6 R19.1 | length 2268.3
  Top Layer w10: R19.1@581.46,790 R19.1 611.46,791.46 650,830 v1(650,1310) ; v1(1390,1650) 1600,1650 1720,1770 1720,1880 1760,1920 1920,1920 J9.6
  Bottom Layer w10: v1(650,1310) 670,1310 830,1470 1050,1470 1180,1600 1340,1600 v1(1390,1650)
PWM_2#: J14.2 Q7.1 R19.2 R22.2 | length 433.8
  Top Layer w10: J14.2 530,670 530,848.54 ; R22.2 530,848.54 ; Q7.1 581.18,849.72 R19.2 530,848.54
RTC_BAT: BAT1.P D1.1 | length 191.3
  Top Layer w10: BAT1.P 1432.6,620.1 D1.1
SCL: Q2.3 R4.2 SB6.1 | length 517.2
  Top Layer w10: Q2.3@410,2040 Q2.3@411.18,2040 ; Q2.3@418.82,2050 Q2.3 Q2.3@411.18,2040 ; R4.2 718.54,1920 690,1920 610,2000 530,2000 v1(490,2040) Q2.3@411.18,2040
  Bottom Layer w10: v1(490,2040) SB6.1 551.46,2048.54 550,2050
SCL_3V3: J1.4 Q2.2 R3.2 TP2.1 U1.6 U2.6 U3.6 | length 1651.5
  Top Layer w10: U1.6 227.72,2050 336.22,2050 Q2.2 448.58,1940 458.58,1930 v1(490,1930) ; J1.4 v1(490,1810) R3.2 ; v1(890,1530) 915,1555 U2.6 ; U3.6 965,1855 v1(990,1830)
  Bottom Layer w10: v1(490,1930) TP2.1 v1(490,1810) 970,1810 v1(990,1830) 1020,1800 1020,1720 890,1590 v1(890,1530)
SCL_SHL: J10.10 SB6.2 | length 148
  Bottom Layer w10: SB6.2 700,2040 J10.10
SDA: Q1.3 R2.1 SB5.1 | length 472.3
  Top Layer w10: Q1.3 618.82,2041.18 v1(660,2000) 720,1940 778.54,1940 R2.1
  Bottom Layer w10: SB5.1 551.46,1969.68 581.78,2000 v1(660,2000)
SDA_3V3: J1.3 Q1.2 R1.2 TP1.1 U1.1 U2.5 U3.5 | length 2287
  Top Layer w10: v1(50,2010) 69.37,2029.37 U1.1 ; J1.3 350,1870 548.58,1870 Q1.2 ; v1(490,1980) 576.22,1980 Q1.2 ; R1.2 687.68,1868.54 Q1.2 ; v1(850,1930) 875,1905 U3.5 ; v1(940,1530) 965,1555 U2.5
  Bottom Layer w10: v1(50,2010) 130,2010 160,1980 TP1.1 v1(490,1980) 520,1950 520,1930 540,1910 830,1910 v1(850,1930) 950,1930 1050,1830 1050,1700 940,1590 v1(940,1530)
SDA_SHL: J10.9 SB5.2 | length 260.1
  Bottom Layer w10: SB5.2 608.54,1951.46 791.46,1951.46 J10.9
SENSOR_1: P3.3 R31.1 SB8.1 U6.3 | length 572.9
  Top Layer w10: SB8.1 2138.54,640 R31.1 ; U6.3 2165,696.46 R31.1 ; P3.3 2472.23,680 2260,680 2221.46,641.46 R31.1
SENSOR_2: P4.3 R36.1 SB9.1 U6.5 | length 543.1
  Top Layer w10: SB9.1 2212.91,1051.46 R36.1@2215,1053.54 ; U6.5 R36.1@2215,1053.54 ; P4.3 2472.23,1100 2260,1100 2221.46,1061.46 R36.1 R36.1@2215,1053.54
SNS_EN: J10.1 R8.1 | length 1362.6
  Top Layer w10: v1(1640,1630) 1640,1300 v1(1690,1250) ; v1(1690,1030) 1694.14,1030 1830,894.14 R8.1
  Bottom Layer w10: v1(1640,1630) J10.1 ; v1(1690,1030) v1(1690,1250)
SNSPWR: P3.2 P4.2 Q3.3 R9.2 | length 1812.5
  Top Layer w10: R9.2 2431.46,1060.01 P4.2
  Bottom Layer w30: v1(1850,450) 1920,520 2330,520 2390,460 2580,460 2620,500 2620,640.01 ; P3.2 2620,640.01 ; P4.2 2579.99,1060.01 2620,1020 2620,640.01
  other v1: 1810,450
SNSPWR_SEL: J2.3 Q3.2 R5.1 | length 3.7
  Top Layer w10: Q3.2@1726.22,460 Q3.2
SW_1: J9.4 R28.2 | length 378
  Top Layer w10: R28.2 2160,1960 J9.4
SW_1#: C10.2 D11.C J15.2 R25.1 R28.1 | length 1218.3
  Top Layer w10: R28.1 2100.98,1581.46 C10.2 2010,1490.47 2010,1420 1990,1400 1950,1400 1910,1360 1910,1280 1950,1240 1998.54,1240 R25.1 2078.54,1240 2230,1240 2270.63,1280.63 D11.C 2500.63,1280.63 J15.2
SW_2: J10.5 R29.2 | length 851.2
  Top Layer w10: J10.5 1290,2050 1680,2050 v1(1730,2000) ; R29.2 1710,1720 v1(1730,1740)
  Bottom Layer w10: v1(1730,1740) v1(1730,2000)
SW_2#: C11.2 D12.C J16.2 R26.1 R29.1 | length 1135.8
  Top Layer w10: R29.1@1700,1631.46 1710,1621.46 1710,1530 v1(1830,1410) ; v1(2090,1450) C11.2 2039.53,1360.98 R26.1 2080.63,1360 D12.C 2199.37,1320 2390,1320 J16.2
  Bottom Layer w10: v1(1830,1410) 2050,1410 v1(2090,1450)
VDD_RTC: C2.2 D1.3 U2.8 | length 1576.7
  Top Layer w10: U2.8 815,1665.47 C2.2 780,1659.53 780,1200 790,1190 790,1150 780,1140 780,920 820,880 1461.18,880 D1.3
VIN: D6.C D8.C J5.2 J12.1 P1.2 P2.2 R15.2 R16.2 SB3.1
  other v1: 70,430 110,430 150,430 70,470 110,470 150,470 70,510 110,510 150,510
VIN_SHL: J3.8 SB3.2
VIO: J8.3 R2.2 R4.1 R12.2 R13.1 R14.2 R23.1 R24.1 R25.2 R26.2 | length 1667.4
  Top Layer w10: v1(890,1170) R13.1 ; R25.2 v1(1941.46,1320) R26.2 ; R14.2 v1(2090,1640) ; R24.1 2161.46,1510 v1(2220,1510) ; R12.2 2220,1598.54 v1(2220,1510) ; R23.1 2278.54,1510 v1(2220,1510)
  Bottom Layer w10: v1(760,1170) v1(890,1170)
  Bottom Layer w15: v1(1750,900) 1840,990 1840,1240 1920,1320 v1(1941.46,1320) 2030,1320 v1(2220,1510) v1(2090,1640)
VIO#: J8.1 SB1.1
  other v1: 1360,230 1400,230 1360,270 1400,270
VIO_SHL#: J3.2 SB1.2
pads on no net: BAT1.M1 BAT1.M2 BZ1.N.C. J3.1 J3.3 J9.1 J9.2 J10.6 J10.8 J11.5 J11.6 U1.3 U1.4 U1.TAB U2.3 U2.7 U4.1 U5.2

## Polygon pours and split planes (outlines as drawn)
VIN_SHL on Bottom Layer "VIN_SHL_L02_P046" (solid, remove dead copper, pour order 46): 500,110 500,20 1870,20 1870,170 1770,170 1770,60 580,60 580,110
GND_SHL1 on Bottom Layer "GND_SHL1_L02_P002" (solid, remove dead copper, pour order 2): 1540,70 1756.49,70 1756.49,230 1540,230
VIN on Bottom Layer "VIN_L02_P024" (solid, remove dead copper, pour order 24): 190,910 290,910 290,740 190,740 190,400 30,400 30,1470 290,1470 290,1300 190,1300
VIO# on Bottom Layer "VIO#_L02_P014" (solid, remove dead copper, pour order 14): 1420,180 1420,300 1270,300 1270,180
VIO_SHL# on Bottom Layer "VIO_SHL#_L02_P006" (solid, remove dead copper, pour order 6): 1260,260 1260,190 1260,70 1140,70 1140,260
GND_SHL2 on Bottom Layer "GND_SHL2_L02_P004" (solid, remove dead copper, pour order 4): 980,1940 1040,1940 1040,1880 1200,1880 1200,2060 980,2060
5V on Bottom Layer "5V_L02_P050" (solid, remove dead copper, pour order 50): 740,260 1030,260 1030,390 1550,390 1550,70 1030,70 1030,180 740,180
VIN on Bottom Layer "VIN_L02_P048" (solid, remove dead copper, pour order 48): 500,110 500,260 710,260 710,170 580,170 580,110
GND on Bottom Layer "GND_L02_P054" (solid, remove dead copper, pour order 54): -20,2120 2720,2120 2720,-20 -20,-20
GND on Top Layer "GND_L01_P064" (solid, remove dead copper, pour order 64): 10,1720 660,1720 660,310 10,310 10,10 2690,10 2690,2090 10,2090
SNSPWR on Top Layer "SNSPWR_L01_P032" (solid, remove dead copper, pour order 32): 1790,540 1870,540 1870,430 1790,430
VIN on Top Layer "VIN_L01_P026" (solid, remove dead copper, pour order 26): 30,390 360,390 360,190 570,190 570,550 30,550
HVOUT_1_GND on Top Layer "HVOUT_1_GND_L01_P022" (solid, remove dead copper, pour order 22): 120,1460 120,1620 520,1620 520,1460
GND on Top Layer "GND_L01_P016" (solid, remove dead copper, pour order 16): 530,1130 630,1130 630,970 530,970 530,1040
GND on Top Layer "GND_L01_P020" (solid, remove dead copper, pour order 20): 530,1690 630,1690 630,1530 530,1530 530,1590
HVOUT_2_GND on Top Layer "HVOUT_2_GND_L01_P018" (solid, remove dead copper, pour order 18): 150,1050 520,1050 520,900 150,900
VIN on Top Layer "VIN_L01_P028" (solid, remove dead copper, pour order 28): 630,270 720,270 720,130 570,130 570,180 10,180 10,1450 430,1450 430,560 630,560
SNSPWR_SEL on Top Layer "SNSPWR_SEL_L01_P034" (solid, remove dead copper, pour order 34): 1620,297 1860,297 1860,370 1780,370 1780,500 1620,500
GND on Top Layer "GND_L01_P040" (solid, remove dead copper, pour order 40): 1200,1160 1340,1160 1340,1030 1200,1030
VIO# on Top Layer "VIO#_L01_P012" (solid, remove dead copper, pour order 12): 1340,290 1550,290 1620,290 1620,210 1340,210
GND on Top Layer "GND_L01_P056" (solid, remove dead copper, pour order 56): 1240,1290 1390,1290 1390,1210 1240,1210
NetD13_C on Top Layer "NETD13_C_L01_P062" (solid, remove dead copper, pour order 62): 1060,1470 1160,1470 1160,1310 1060,1310
NetBZ1_P on Top Layer "NETBZ1_P_L01_P060" (solid, remove dead copper, pour order 60): 1620,1480 1620,1610 1060,1610 1060,1480
3V3 on Top Layer "3V3_L01_P008" (solid, remove dead copper, pour order 8): 670,1730 10,1730 10,2090 730,2090 730,820 1170,820 1170,290 1330,290 1330,200 1630,200 1630,290 1820,290 1820,160 1460,160 1460,40 1340,40 870,40 870,280 670,280
5V on Top Layer "5V_L01_P044" (solid, remove dead copper, pour order 44): 1070,910 1500,910 1500,940 1790,940 1790,160 1460,160 1460,40 1940,40 1940,930 2020,930 2020,990 1940,990 1940,1200 1780,1200 1150,1200 1150,1260 1070,1260
BZGND on Top Layer "BZGND_L01_P058" (solid, remove dead copper, pour order 58): 1170,1480 1620,1480 1620,1200 1400,1200 1400,1360 1170,1360
VIO on Top Layer "VIO_L01_P038" (solid, remove dead copper, pour order 38): 1180,830 740,830 740,1910 880,1910 880,1760 770,1760 770,870 1509.99,870 1510.02,930 1780,930 1780,300 1180,300

## Keep-outs
Top Layer:
  lines w10: -40,1720 660,1720 660,310
Bottom Layer:
  lines w3: -100,1720 660,1720 660,1240 420,1240 420,1120 660,1120 660,680 420,680 420,560 660,560 660,410
Keep-Out Layer:
  lines w1: 20,20 2580,20 2580,60 2680,160 2680,1500 2580,1600 2580,2000 2500,2080 20,2080 20,20

## Other copper
Bottom Layer:
  rectangle net SNSPWR: 1790,430 1870,470

## Silkscreen, mask and mechanical layers (free items; w line width, h text height)
Top Overlay:
  text "BZR" at 1350,1390 h60 r90
  text "PWM#1" at 230,1160 h60
  text "PWM#2" at 220,600 h60
Bottom Overlay:
  text "AW_SHIELD" at 2520,1838.58 h60
  text "Rev.A" at 2520,1748.58 h60
  text "2022/11" at 2520,1658.58 h60
Mechanical 1:
  the board outline again, w5